# EAGLE board v0.2 (EAGLE 9.3.2)
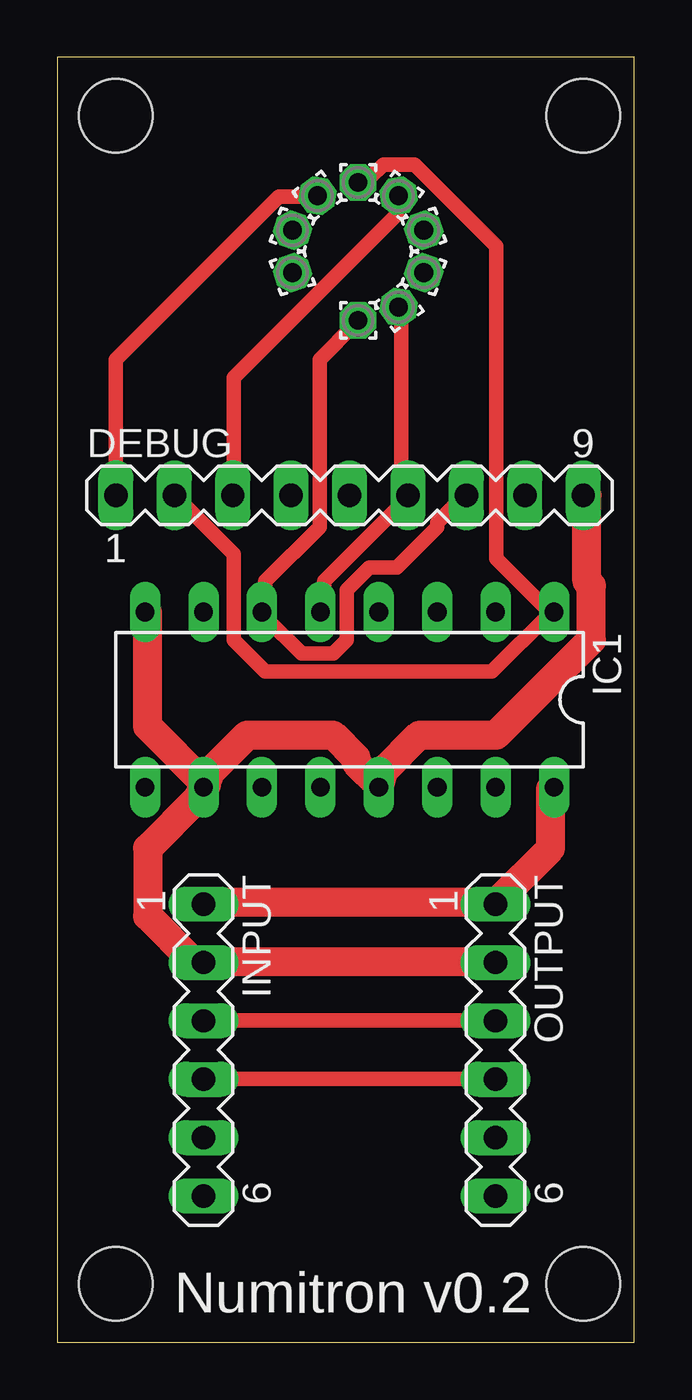
[diagram p0: board, top side]
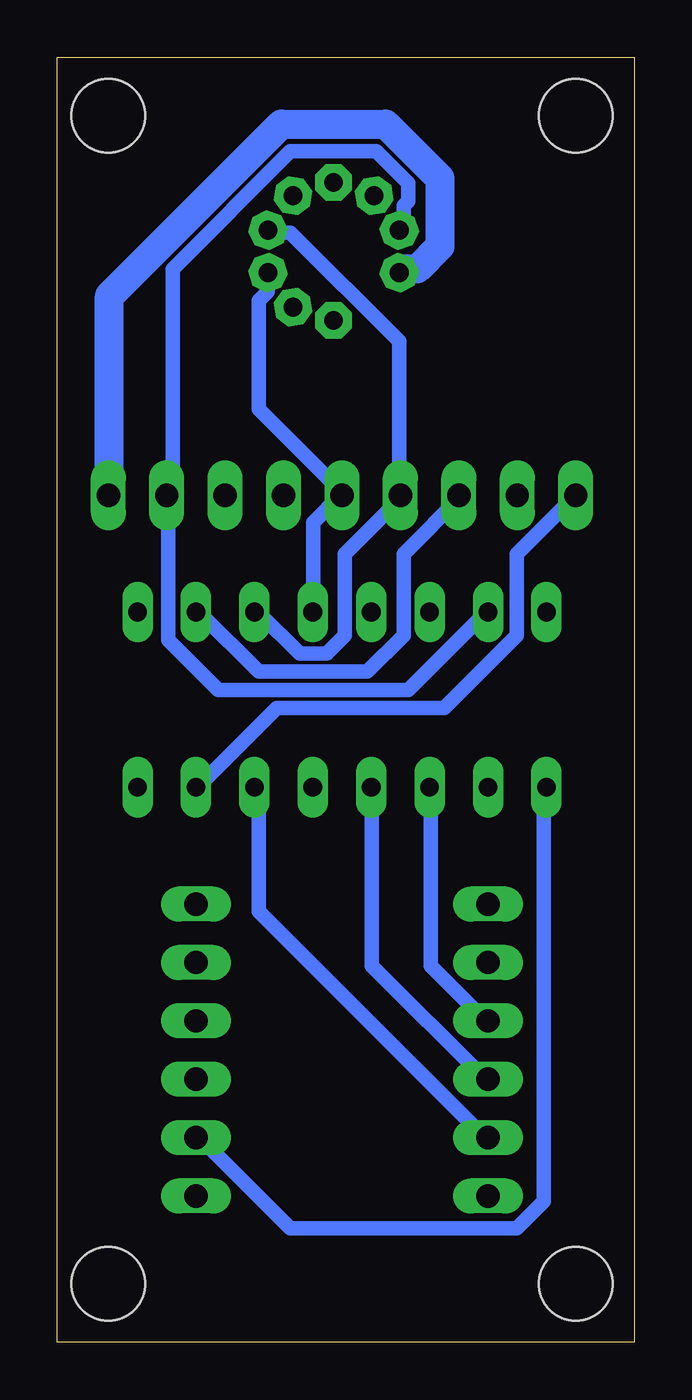
[diagram p1: board, bottom side, seen from below]

Size 25.07 x 55.87 mm. Coordinates in mm from the lower left corner, seen from the top.
Outline: 0,0 25.07,0 25.07,55.87 0,55.87 0,0
Copper layers (1*16): Top 0.035mm / dielectric 1.5mm / Bottom 0.035mm
Design rules "default": minimum track width 6mil, minimum drill 0.35mm, track to track 6mil, track to pad 6mil, pad to pad 6mil, via to via 6mil, smd to smd 6mil, copper to edge 40mil, drill to drill 6mil, minimum pad ring 10mil, minimum via ring 8mil, stop-mask expansion 4mil, vias tented up to drill 0mil, thermal gap 10mil
Net classes: 0 default: width 0.635 mm; 1 ground: width 1.27 mm; 2 vcc: width 1.27 mm; 3 audio: width 1.27 mm
Holes 3.2 mm at 2.54,53.34 22.86,53.34 22.86,2.54 2.54,2.54

## Footprints (pad centres in the part's own frame; a part is rotated, then mirrored left to right if it is on the bottom)
1,6/0,8 = drill 0.813 pad 1.6 octagon: 1 0,0
MA09-1 = drill 1.016 long: 1 -10.16,0; 2 -7.62,0; 3 -5.08,0; 4 -2.54,0; 5 0,0; 6 2.54,0; 7 5.08,0; 8 7.62,0; 9 10.16,0
DIL16 = drill 0.813 long: 1 -8.89,-3.81; 2 -6.35,-3.81; 3 -3.81,-3.81; 4 -1.27,-3.81; 5 1.27,-3.81; 6 3.81,-3.81; 7 6.35,-3.81; 8 8.89,-3.81; 9 8.89,3.81; 10 6.35,3.81; 11 3.81,3.81; 12 1.27,3.81; 13 -1.27,3.81; 14 -3.81,3.81; 15 -6.35,3.81; 16 -8.89,3.81
MA06-1 = drill 1.016 long: 1 -6.35,0; 2 -3.81,0; 3 -1.27,0; 4 1.27,0; 5 3.81,0; 6 6.35,0

## Placement (x,y rotation side)
CMN  [1,6/0,8]  10.21,46.51 198 top
DEBUG  [MA09-1]  12.7,36.83 0 top
DEC  [1,6/0,8]  10.21,48.36 162 top
IC1  74LS595N  [DIL16]  12.7,27.94 180 top
INPUT  [MA06-1]  6.35,12.7 270 top
OUTPUT  [MA06-1]  19.05,12.7 270 top
SEGA  [1,6/0,8]  11.3,49.86 126 top
SEGB  [1,6/0,8]  13.07,50.43 90 top
SEGC  [1,6/0,8]  14.83,49.86 144 top
SEGD  [1,6/0,8]  15.92,48.36 18 top
SEGE  [1,6/0,8]  15.92,46.51 342 top
SEGF  [1,6/0,8]  14.83,45.01 306 top
SEGG  [1,6/0,8]  13.07,44.43 270 top

## Library data of the parts
CMN DEC SEGA SEGB SEGC SEGD SEGE SEGF SEGG = wirepad
DEBUG INPUT OUTPUT = con-lstb; OC_FARNELL: unknown; OC_NEWARK: unknown
IC1 = 74xx-eu

## Nets
GND [ground]: CMN.1 DEBUG.9 IC1.8 IC1.10 IC1.13 INPUT.2 OUTPUT.2
N$1: DEBUG.1 IC1.15 SEGA.1
N$2: IC1.9 OUTPUT.5
N$3: DEBUG.3 IC1.2 SEGC.1
N$4: DEBUG.4 IC1.3 SEGD.1
N$5: DEBUG.5 IC1.4 SEGE.1
N$6: DEBUG.6 IC1.5 SEGF.1
N$7: DEBUG.7 IC1.6 SEGG.1
N$8: DEBUG.8 DEC.1 IC1.7
N$10: DEBUG.2 IC1.1 SEGB.1
RCK: IC1.12 INPUT.4 OUTPUT.4
RX: IC1.14 INPUT.5
SCK: IC1.11 INPUT.3 OUTPUT.3
VCC [vcc]: IC1.16 INPUT.1 OUTPUT.1

## Tracks (layer width: path | path; a pad name or v marks a point on that pad's centre or on a via)
GND
  Top 1.27: IC1.8 3.92,31.71 3.92,26.79 6.48,24.23 IC1.10 | IC1.10 6.67,24.82 8.25,26.4 11.99,26.4 12.97,25.41 12.97,25.22 13.96,24.23 IC1.13 14.15,24.82 15.73,26.4 19.08,26.4 23.21,30.53 23.21,32.89 23.01,33.09 23.01,36.83 DEBUG.9 | IC1.10 6.08,23.64 3.92,21.48 3.92,18.52 5.89,16.55 6.28,16.55 INPUT.2 6.87,16.55 18.88,16.55 OUTPUT.2
  Bottom 1.27: CMN.1 10.02,46.67 9.43,46.67 8.45,47.66 8.45,50.61 10.81,52.97 15.34,52.97 22.82,45.49 22.82,36.83 DEBUG.9
N$1
  Top 0.635: DEBUG.1 2.54,42.74 9.63,49.82 11.2,49.82 SEGA.1
  Bottom 0.635: DEBUG.1 5.1,34.27 5.1,30.73 8.25,27.58 15.53,27.58 18.88,24.23 IC1.15
N$2
  Bottom 0.635: IC1.9 3.92,24.04 3.92,6.12 5.1,4.94 14.94,4.94 18.88,8.88 OUTPUT.5
N$3
  Top 0.635: SEGC.1 14.75,49.82 14.75,49.04 7.66,41.95 7.66,36.83 DEBUG.3
  Bottom 0.635: IC1.2 18.88,31.71 16.32,29.15 11.59,29.15 10.02,30.73 10.02,34.27 7.46,36.83 DEBUG.3
N$4
  Bottom 0.635: IC1.3 16.32,31.71 14.55,29.94 13.37,29.94 12.58,30.73 12.58,34.27 10.02,36.83 DEBUG.4 10.22,37.03 10.22,43.52 14.94,48.25 15.73,48.25 SEGD.1
N$5
  Bottom 0.635: IC1.4 13.96,31.91 13.96,35.65 12.78,36.83 DEBUG.5 12.78,37.03 16.32,40.57 16.32,45.3 15.93,45.69 15.93,46.48 SEGE.1
N$6
  Top 0.635: IC1.5 11.59,31.91 11.59,33.09 15.34,36.83 DEBUG.6 14.94,36.83 14.94,44.9 SEGF.1
N$7
  Top 0.635: SEGG.1 12.97,44.31 11.4,42.74 11.4,35.45 9.04,33.09 9.04,31.91 IC1.6 9.04,31.52 10.61,29.94 11.99,29.94 12.58,30.53 12.58,32.7 13.56,33.68 14.75,33.68 16.52,35.45 16.52,35.65 17.7,36.83 DEBUG.7
N$8
  Bottom 0.635: IC1.7 6.48,31.71 9.82,28.37 18.09,28.37 20.26,30.53 20.26,36.83 DEBUG.8 20.06,37.03 20.06,46.67 14.94,51.79 11.2,51.79 9.82,50.41 9.82,49.62 10.02,49.43 10.02,48.44 DEC.1
N$10
  Top 0.635: DEBUG.2 5.1,36.83 7.66,34.27 7.66,30.53 9.04,29.15 18.88,29.15 21.44,31.71 IC1.1 21.24,31.91 19.08,34.07 19.08,47.66 15.53,51.2 14.15,51.2 13.56,50.61 13.17,50.61 SEGB.1
RCK
  Top 0.635: OUTPUT.4 18.88,11.44 6.48,11.44 INPUT.4
  Bottom 0.635: IC1.12 11.4,24.04 11.4,16.36 6.48,11.44 INPUT.4
RX
  Bottom 0.635: IC1.14 16.32,24.04 16.32,18.72 6.48,8.88 INPUT.5
SCK
  Top 0.635: OUTPUT.3 18.88,14 6.48,14 INPUT.3
  Bottom 0.635: IC1.11 8.84,24.04 8.84,16.36 6.48,14 INPUT.3
VCC
  Top 1.27: IC1.16 21.44,24.04 21.44,21.48 19.08,19.11 OUTPUT.1 18.48,19.11 6.48,19.11 INPUT.1

## Text on the board
tPlace: Numitron v0.2